# EAGLE board LED_Hat_Schematic (EAGLE 9.7.0)
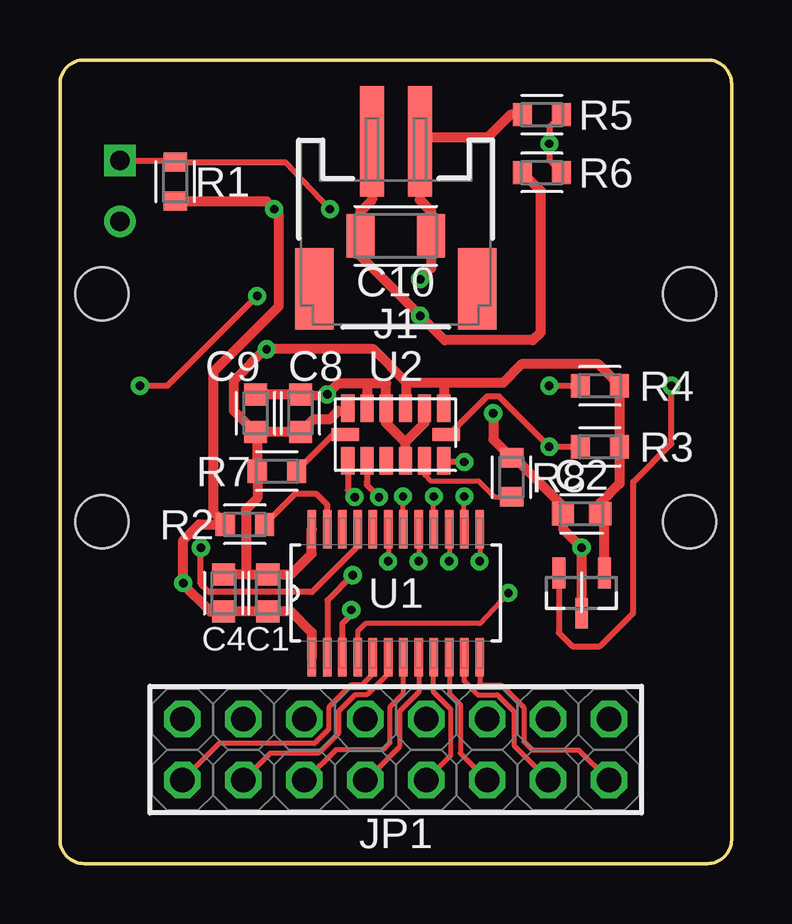
[diagram p0: board, top side]
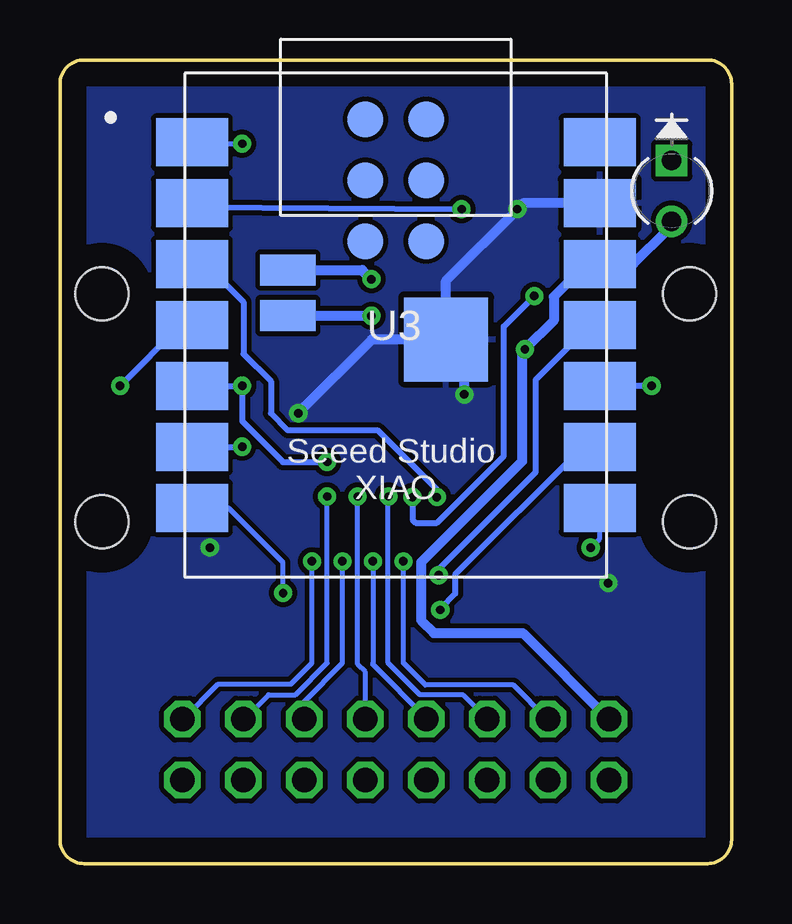
[diagram p1: board, bottom side, seen from below]

Size 28 x 33.5 mm. Coordinates in mm from the lower left corner, seen from the top.
Outline: 0,32.5 0,1 arc90 1,0 27,0 arc90 28,1 28,32.5 arc90 27,33.5 1,33.5 arc90 0,32.5
Copper layers (1*16): Top 0.035mm / dielectric 1.5mm / Bottom 0.035mm
Design rules "Fusion Electronics Design Rules": minimum track width 8mil, minimum drill 0.35mm, track to track 8mil, track to pad 6mil, pad to pad 6mil, via to via 6mil, smd to smd 6mil, copper to edge 40mil, drill to drill 6mil, minimum pad ring 10mil, minimum via ring 8mil, stop-mask expansion 4mil, vias tented up to drill 9999mil, thermal gap 10mil
Net classes: 1 Power: width 0.254 mm
Holes 2.2 mm at 1.75,23.75 26.25,23.75 26.25,14.25 1.75,14.25

## Footprints (pad centres in the part's own frame; a part is rotated, then mirrored left to right if it is on the bottom)
CAPC1608X85 = smd 0.921 x 0.97: 1 -0.775,0; 2 0.775,0
CAPC3216X135 = smd 1.165 x 1.815: 1 -1.475,0; 2 1.475,0
S2B-PH-SM4-TB = smd 4.6 x 1: 1 -3.84,1; 2 -3.84,-1 | smd 3.4 x 1.6: NC1 2.3,3.4; NC2 2.3,-3.4
2X08 = drill 1.016 octagon: 1 -8.89,1.27; 2 -6.35,1.27; 3 -3.81,1.27; 4 -1.27,1.27; 5 1.27,1.27; 6 3.81,1.27; 7 6.35,1.27; 8 8.89,1.27; 9 -8.89,-1.27; 10 -6.35,-1.27; 11 -3.81,-1.27; 12 -1.27,-1.27; 13 1.27,-1.27; 14 3.81,-1.27; 15 6.35,-1.27; 16 8.89,-1.27
RESC1608X60 = smd 0.799 x 0.974: 1 -0.815,0; 2 0.815,0
SOP63P600X175-24N = smd 1.6 x 0.356: 1 -2.667,3.505; 2 -2.667,2.845; 3 -2.667,2.235; 4 -2.667,1.575; 5 -2.667,0.965; 6 -2.667,0.305; 7 -2.667,-0.305; 8 -2.667,-0.965; 9 -2.667,-1.575; 10 -2.667,-2.235; 11 -2.667,-2.845; 12 -2.667,-3.505; 13 2.667,-3.505; 14 2.667,-2.845; 15 2.667,-2.235; 16 2.667,-1.575; 17 2.667,-0.965; 18 2.667,-0.305; 19 2.667,0.305; 20 2.667,0.965; 21 2.667,1.575; 22 2.667,2.235; 23 2.667,2.845; 24 2.667,3.505
ADXL345_LGA14 = smd 1.145 x 0.55: 1 -1.097,2; 2 -1.097,1.2; 3 -1.097,0.4; 4 -1.097,-0.4; 5 -1.097,-1.2; 6 -1.097,-2; 8 1.097,-2; 9 1.097,-1.2; 10 1.097,-0.4; 11 1.097,0.4; 12 1.097,1.2; 13 1.097,2 | smd 0.55 x 1.145: 7 0,-2.098; 14 0,2.098
XIAO-ESP32C3-MODULE14P-2.54-21X17.8MM = smd 3 x 2: 1 -8.5,7.62; 2 -8.5,5.08; 3 -8.5,2.54; 4 -8.5,0; 5 -8.5,-2.54; 6 -8.5,-5.08; 7 -8.5,-7.62; 8 8.5,-7.62; 9 8.5,-5.08; 10 8.5,-2.54; 11 8.5,0; 12 8.5,2.54; 13 8.5,5.08; 14 8.5,7.62 | smd 1.5 x 1.5: 15 -1.27,8.58; 16 1.27,8.58; 17 -1.27,6.04; 18 1.27,6.04; 19 -1.27,3.5; 20 1.27,3.5 | smd 2.3 x 1.3: 21 -4.5,2.3; 22 -4.5,0.4 | smd 3.5 x 3.5: 23 2.1,-0.6
DBZ0003A-IPC_C = smd 1.274 x 0.532: 1 -0.835,0.95; 2 -0.835,-0.95; 3 0.835,0
LED_TEPT4400_VIS = drill 0.813 pad 1.321 square: 1 0,0 | drill 0.813 pad 1.321: 2 2.54,0

## Placement (x,y rotation side)
C1  0.1uF  [CAPC1608X85]  8.67,11.28 90 top
C2  0.1uF  [CAPC1608X85]  21.75,14.58 180 top
C4  1uF  [CAPC1608X85]  6.82,11.28 90 top
C8  0.1uF  [CAPC1608X85]  10.03,18.77 270 top
C9  1uF  [CAPC1608X85]  8.16,18.77 270 top
C10  10uF  [CAPC3216X135]  14,26.17 180 top
J1  S2B-PH-SM4-TB  [S2B-PH-SM4-TB]  14,26.26 270 top
JP1  PINHD-2X8  [2X08]  14,4.75 0 top
R1  10k  [RESC1608X60]  4.81,28.42 270 top
R2  910  [RESC1608X60]  7.71,14.14 0 top
R3  4.7k  [RESC1608X60]  22.51,17.37 180 top
R4  4.7k  [RESC1608X60]  22.51,19.91 0 top
R5  220k  [RESC1608X60]  20.1,31.22 0 top
R6  220k  [RESC1608X60]  20.1,28.8 0 top
R7  4.7k  [RESC1608X60]  9.05,16.36 0 top
R8  4.7k  [RESC1608X60]  18.83,16.1 270 top
U1  TLC5927IDBQR  [SOP63P600X175-24N]  14,11.28 90 top
U2  ADXL345BCCZ-RL  [ADXL345_LGA14]  14,17.88 270 top
U3  XIAO-ESP32C3  [XIAO-ESP32C3-MODULE14P-2.54-21X17.8MM]  14,22.45 0 bottom
U4  DRV5032FCDBZRDBZ0003A-IPC_C  [DBZ0003A-IPC_C]  21.75,11.28 270 top
U5  TEPT4400LED_TEPT4400_VIS  [LED_TEPT4400_VIS]  2.49,29.31 270 bottom

## Library data of the parts
C1 C2 C4 C8 C9 = Capacitor; CATEGORY: Capacitor; PACKAGE_SIZE: 0603; PACKAGE_TYPE: Surface Mount; SUBCATEGORY: Ceramic Capacitors; TYPE: MLCC
C10 = Capacitor; CATEGORY: Capacitor; PACKAGE_SIZE: 1206; PACKAGE_TYPE: Surface Mount; SUBCATEGORY: Ceramic Capacitors; TYPE: MLCC
J1 = Connector; CATEGORY: Connectors; DATASHEET: https://www.jst-mfg.com/product/pdf/eng/ePH.pdf; DESCRIPTION: Connector Header Surface Mount Right Angle 2 position 0.079" (2.00mm); MANUFACTURER: JST Sales America Inc.; MPN: S2B-PH-SM4-TB; OPERATING_TEMPERATURE: -25°C ~ 85°C; PACKAGE_SIZE: NA; PACKAGE_TYPE: Surface Mount; PART_STATUS: Active; PITCH: 0.079" (2.00mm); ROHS: Compliant; SERIES: PH; TYPE: Right Angle
JP1 = Connector; CATEGORY: Connectors; DESCRIPTION: Header-Straight-2x8 Position; PACKAGE_TYPE: Through Hole; PITCH: 0.100" (2.54mm); SUBCATEGORY: Headers; TYPE: Male Pins
R1-R8 = Resistor; CATEGORY: Resistors; DESCRIPTION: Chip Resistor 1.60 X 0.82 X 0.60 mm body 0603(1608-METRIC) Package; PACKAGE_SIZE: 0603; PACKAGE_TYPE: Surface Mount
U1 = TLC5927IDBQR; MPN: TLC5927IDBQR; OC_FARNELL: 1858095; OC_NEWARK: 33R2185; PACKAGE: SSOP-24; SUPPLIER: Texas Instruments
U2 = Sensor; CATEGORY: Sensors & Transducers; DATASHEET: https://www.analog.com/media/en/technical-documentation/data-sheets/ADXL345.pdf; DESCRIPTION: Accelerometer X Y Z Axis ±2g 4g 8g 16g 0.05Hz ~ 1.6kHz 14-LGA (3x5); MANUFACTURER: Analog Devices Inc.; MPN: ADXL345BCCZ-RL; OPERATING_TEMPERATURE: -40°C ~ 85°C; PACKAGE_SIZE: 14-VFLGA; PACKAGE_TYPE: Surface Mount; PART_STATUS: Active; ROHS: Compliant; SERIES: ADXL345; SUBCATEGORY: Motion Sensors; TYPE: Motion Sensors
U3 = Seeed Studio XIAO Series
U4 = 2026-04-01_23-59-34_Library; COPYRIGHT: Copyright (C) 2026 Ultra Librarian. All rights reserved.; DATASHEET: https://www.ti.com/lit/gpn/drv5032; DESCRIPTION: Low-power (5Hz, <1µA) low-voltage (up to 5.5V) switch 3-SOT-23 -40 to 85; MANUFACTURER_NAME: Texas Instruments; MANUFACTURER_PART_NUMBER: DRV5032FCDBZR; REFDES: RefDes; TYPE: TYPE
U5 = 2026-03-17_15-51-54_Library; COPYRIGHT: Copyright (C) 2026 Ultra Librarian. All rights reserved.; DATASHEET: https://www.vishay.com/doc?81341; DESCRIPTION: PHOTO TRANS. 3MM 30DEG-e4; MANUFACTURER_NAME: Vishay; MANUFACTURER_PART_NUMBER: TEPT4400

## Nets
+3.3V [Power]: C1.2 C2.1 C4.2 C8.2 C9.2 JP1.1 R3.1 R4.2 R7.1 U1.24 U2.1 U2.3 U2.6 U3.12 U4.1 U5.2
ALT_ADDRESS: R8.2 U2.12
BAT+ [Power]: C10.2 J1.2 R6.1 U3.22
BAT- [Power]: C10.1 J1.1 R5.1 U3.21
CS: R7.2 U2.7
GND [Power]: C1.1 C2.2 C4.1 C8.1 C9.1 R1.2 R2.1 R8.1 U1.1 U2.2 U2.4 U2.5 U2.11 U3.13 U3.23 U4.3
GPIO2: R5.2 R6.2 U3.1
GPIO3: R1.1 U3.2 U5.1
GPIO4: U2.8 U3.3
GPIO5: U3.4 U4.2
GPIO9: U2.9 U3.10
GPIO20: U1.21 U3.8
GPIO21: U1.4 U3.7
LED1: JP1.9 U1.5
LED2: JP1.10 U1.6
LED3: JP1.11 U1.7
LED4: JP1.12 U1.8
LED5: JP1.13 U1.9
LED6: JP1.14 U1.10
LED7: JP1.15 U1.11
LED8: JP1.16 U1.12
LED9: JP1.8 U1.13
LED10: JP1.7 U1.14
LED11: JP1.6 U1.15
LED12: JP1.5 U1.16
LED13: JP1.4 U1.17
LED14: JP1.3 U1.18
LED15: JP1.2 U1.19
MOSI: U1.2 U3.11
R-EXT: R2.2 U1.23
SCK: U1.3 U3.9
SCL: R3.2 U2.14 U3.6
SDA: R4.1 U2.13 U3.5
X: U1.20
X.: U1.22

## Tracks (layer width: path | path; a pad name or v marks a point on that pad's centre or on a via)
+3.3V  (via drill 0.35)
  Top 0.254: C9.2 8.23,17.92
  Top 0.406: U1.24 10.5,12.92 9.63,12.05 C1.2 7.75,12.05 | U2.6 11.94,18.87 11.6,18.87 11.26,18.53 10.57,18.53 10.11,18.07 C8.2 8.13,18 8.06,18.07 | 7.75,12.05 7.75,14.76 8.23,15.24 R7.1 8.23,17.92 | 8.06,18.07 7.26,18.87 7.26,20.14 8.55,21.44 v8.62,21.44 13.07,21.44 14.43,20.08 14.43,20.04 | 8.06,18.07 C9.2 | 16.09,20.04 14.43,20.04 | 16.09,20.04 16,19.95 U2.1 | 14.43,20.04 14.43,19.01 U2.3 | 7.75,12.05 C4.2 | 16.09,20.04 18.47,20.04 19.25,20.82 22.46,20.82 23.26,20.02 R4.2 R3.1 23.32,15.84 22.52,15.04 C2.1 22.7,14.41 U4.1
  Bottom 0.406: JP1.1 8.7,9.61 12.41,9.61 12.94,10.14 12.94,12.55 8.73,16.77 8.73,21.55 v8.62,21.44 7.41,22.64 7.41,23.63 6.07,24.97 5.51,24.97 U3.12 4.11,24.98 2.64,26.45 U5.2 | JP1.1
ALT_ADDRESS
  Top 0.203: U2.12 15.22,16.77 15.22,16.36 15.22,16.2 15.46,15.96 17.44,15.96 18.11,15.29 18.64,15.29
  Top 0.254: 18.64,15.29 R8.2
BAT+  (via drill 0.35)
  Top 0.406: R6.1 20.03,28.05 20.03,22.14 19.71,21.82 16.03,21.82 v15.02,22.84 12.53,25.33 C10.2 12.53,27.18 13,27.66 J1.2
  Bottom 0.406: U3.22 18.49,22.84 16.67,22.84 v15.02,22.84
BAT-  (via drill 0.35)
  Top 0.406: R5.1 18.77,31.22 17.82,30.27 15.16,30.27 J1.1 15,27.66 15.47,27.18 C10.1 15.47,24.82 v15.02,24.36
  Bottom 0.406: v15.02,24.36 15.4,24.74 U3.21
CS
  Top 0.254: U2.7 11.39,17.88 R7.2
GND  (via drill 0.35)
  Top 0.406: U1.1 10.5,9.64 9.63,10.5 C1.1 C4.1 6.28,10.5 5.14,11.64 v5.14,11.69 5.14,13.47 5.8,14.14 R2.1 6.38,14.66 6.38,20.49 9.11,23.22 9.11,27.1 v8.93,27.28 8.62,27.6 4.82,27.6 R1.2 | U2.2 15.21,18.37 14.46,17.62 14.39,17.62 | 14.39,17.62 14.34,17.62 13.59,18.37 U2.4 13.6,20.02 12.79,20.02 | 14.39,17.62 14.39,16.79 U2.11 | 12.79,20.02 11.6,20.02 v11.14,19.56 11.05,19.47 C8.1 C9.1 | 12.79,20.02 12.8,20.01 U2.5 | v18.06,18.77 18.06,17.68 R8.1 18.95,16.92 20.97,14.9 C2.2 20.97,13.95 v21.75,13.17 U4.3
  Bottom 0.406: v11.14,19.56 11.14,21.09 U3.23 | U3.23 14.99,21.84 v18.06,18.77 | U3.23 11.9,24.3 8.93,27.27 v8.93,27.28 8.69,27.52 U3.13
  pour Bottom: -1.32,-5.26 30.02,-5.26 32.06,-3.22 32.06,32.76 28.31,36.51 -4.37,36.51 -5.33,35.42 -5.33,-1.25
GPIO2  (via drill 0.35)
  Top 0.254: R5.2 20.4,30.71 v20.4,30.01 20.4,29.31 R6.2
  Bottom 0.203: U3.1 22.45,30.01 v20.4,30.01
GPIO3  (via drill 0.35)
  Top 0.254: U5.1 4.74,29.31 R1.1 9.41,29.24 v11.26,27.28
  Bottom 0.254: U3.2 22.34,27.37 v11.26,27.28
GPIO4  (via drill 0.35)
  Top 0.254: U2.8 12,15.56 v12.29,15.28
  Bottom 0.254: U3.3 22.44,24.92 21.87,24.92 20.35,23.41 20.35,21.25 19.21,20.1 19.21,18.77 18.51,18.07 14.76,18.07 12.29,15.6 v12.29,15.28
GPIO5  (via drill 0.35)
  Top 0.254: U4.2 20.8,9.62 21.37,9.05 22.51,9.05 23.91,10.45 23.91,15.91 25.49,17.5 v25.49,19.91
  Bottom 0.254: v25.49,19.91 22.96,22.45 U3.4
GPIO9  (via drill 0.35)
  Top 0.254: U2.9 12.8,15.92 12.79,15.91 12.79,15.79 v13.3,15.28 | v8.22,23.66 4.47,19.91 v3.33,19.91
  Bottom 0.254: v13.3,15.28 13.3,14.33 13.17,14.2 12.29,14.2 9.49,16.99 9.49,22.39 v8.22,23.66 | v3.33,19.91 v3.34,19.91 U3.10
GPIO20  (via drill 0.35)
  Top 0.254: v5.87,13.17 5.87,11.66 6.22,11.31 10.51,11.31 12.43,13.23 U1.21
  Bottom 0.203: U3.8 5.5,13.54 v5.87,13.17
GPIO21  (via drill 0.35)
  Top 0.203: U1.4 12.43,9.7 12.73,10.01 17.5,10.01 v18.7,11.28
  Bottom 0.203: U3.7 20.98,14.82 18.7,12.55 v18.7,11.28
LED1
  Top 0.203: U1.5 13.04,7.88 12.59,7.44 12.14,7.44 11.21,6.51 11.21,5.6 10.61,5 6.63,5 JP1.9
LED2
  Top 0.203: U1.6 13.7,7.93 12.8,7.04 12.31,7.04 11.61,6.34 11.61,5.43 10.78,4.6 8.77,4.6 JP1.10
LED3
  Top 0.203: JP1.11 10.24,3.48 11.51,4.75 13.47,4.75 13.75,5.03 13.75,6.51 14.3,7.07 U1.7
LED4
  Top 0.203: U1.8 14.96,7.15 14.15,6.34 14.15,4.86 12.77,3.48 JP1.12
LED5
  Top 0.203: U1.9 15.57,7.15 16.29,6.44 16.29,4.5 JP1.13
LED6
  Top 0.203: JP1.14 16.69,4.6 16.69,6.61 16.23,7.07 U1.10
LED7
  Top 0.203: U1.11 16.84,7.6 17.41,7.04 18.23,7.04 18.93,6.34 18.93,4.92 20.35,3.5 JP1.15
LED8
  Top 0.203: U1.12 17.5,7.52 17.58,7.44 18.4,7.44 19.33,6.51 19.33,5.09 19.69,4.74 21.62,4.74 22.88,3.48 JP1.16
LED9  (via drill 0.35)
  Top 0.203: U1.13 17.5,12.62 v17.49,12.6
  Bottom 0.203: v17.49,12.6 17.49,8.36 18.37,7.48 21.41,7.48 22.83,6.06 22.89,6.06 JP1.8
LED10  (via drill 0.35)
  Top 0.203: U1.14 16.84,15.29 v16.86,15.3
  Bottom 0.203: JP1.7 20.34,6.01 19.31,7.04 18.18,7.04 16.86,8.36 v16.86,15.3
LED11  (via drill 0.35)
  Top 0.203: U1.15 16.23,12.62 v16.22,12.6
  Bottom 0.203: v16.22,12.6 16.22,8.36 17.81,6.77 JP1.6
LED12  (via drill 0.35)
  Top 0.203: U1.16 15.57,15.29 v15.59,15.3
  Bottom 0.203: JP1.5 15.27,7.99 15.59,8.31 v15.59,15.3
LED13  (via drill 0.35)
  Top 0.203: U1.17 14.96,12.62 v14.95,12.6
  Bottom 0.203: v14.95,12.6 14.95,8.36 14.95,8.29 12.73,6.07 JP1.4
LED14  (via drill 0.35)
  Top 0.203: U1.18 v14.3,15.3
  Top 0.254: U1.18
  Bottom 0.203: JP1.3 11.21,7.04 13,7.04 14.32,8.36 14.32,15.29 v14.3,15.3
LED15  (via drill 0.35)
  Top 0.203: U1.19 13.7,12.62 v13.68,12.6
  Bottom 0.203: v13.68,12.6 13.68,8.36 12.77,7.44 9.1,7.44 7.67,6.02 JP1.2
MOSI  (via drill 0.35)
  Top 0.254: v12.21,12.02 11.15,10.97 U1.2
  Bottom 0.254: U3.11 5.88,22.45 8.16,20.17 8.16,16.32 12.21,12.28 v12.21,12.02
R-EXT
  Top 0.254: U1.23 11.15,14.95 10.7,15.41 9.8,15.41 R2.2
SCK  (via drill 0.35)
  Top 0.203: v12.15,10.57 12.14,10.37
  Top 0.254: U1.3 11.77,9.99 12.14,10.37
  Bottom 0.203: 5.55,17.31 U3.9
  Bottom 0.254: 5.55,17.31 6.26,17.31 11.52,12.05 11.52,11.26 12.15,10.64 v12.15,10.57
SCL  (via drill 0.35)
  Top 0.254: R3.2 v20.4,17.37 18.3,19.47 17.81,19.47 16.22,17.88 U2.14
  Bottom 0.203: U3.6
  Bottom 0.254: U3.6 v20.4,17.37
SDA  (via drill 0.35)
  Top 0.254: R4.1 v20.4,19.91 | U2.13 16.06,16.82 16.13,16.74 v16.86,16.74
  Bottom 0.203: 20.36,19.91 v20.4,19.91
  Bottom 0.254: U3.5 20.36,19.91 | v20.4,19.91 20.4,18.44 18.7,16.74 v16.86,16.74